# EAGLE board Atemfrequenzmesser_Board_V1 (EAGLE 9.6.2)
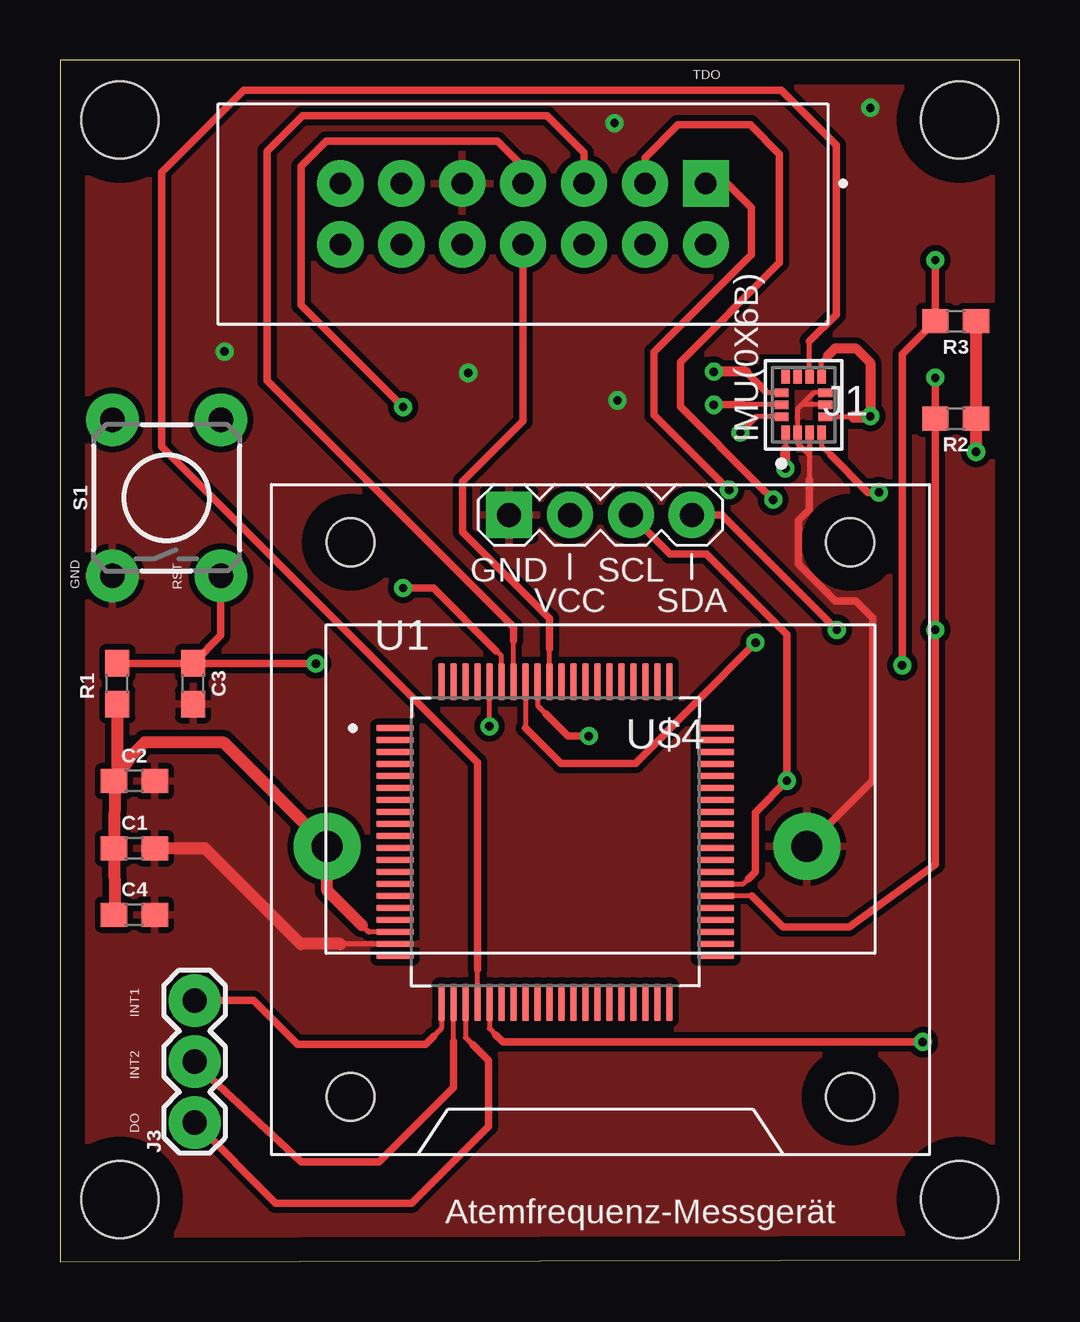
[diagram p0: board, top side]
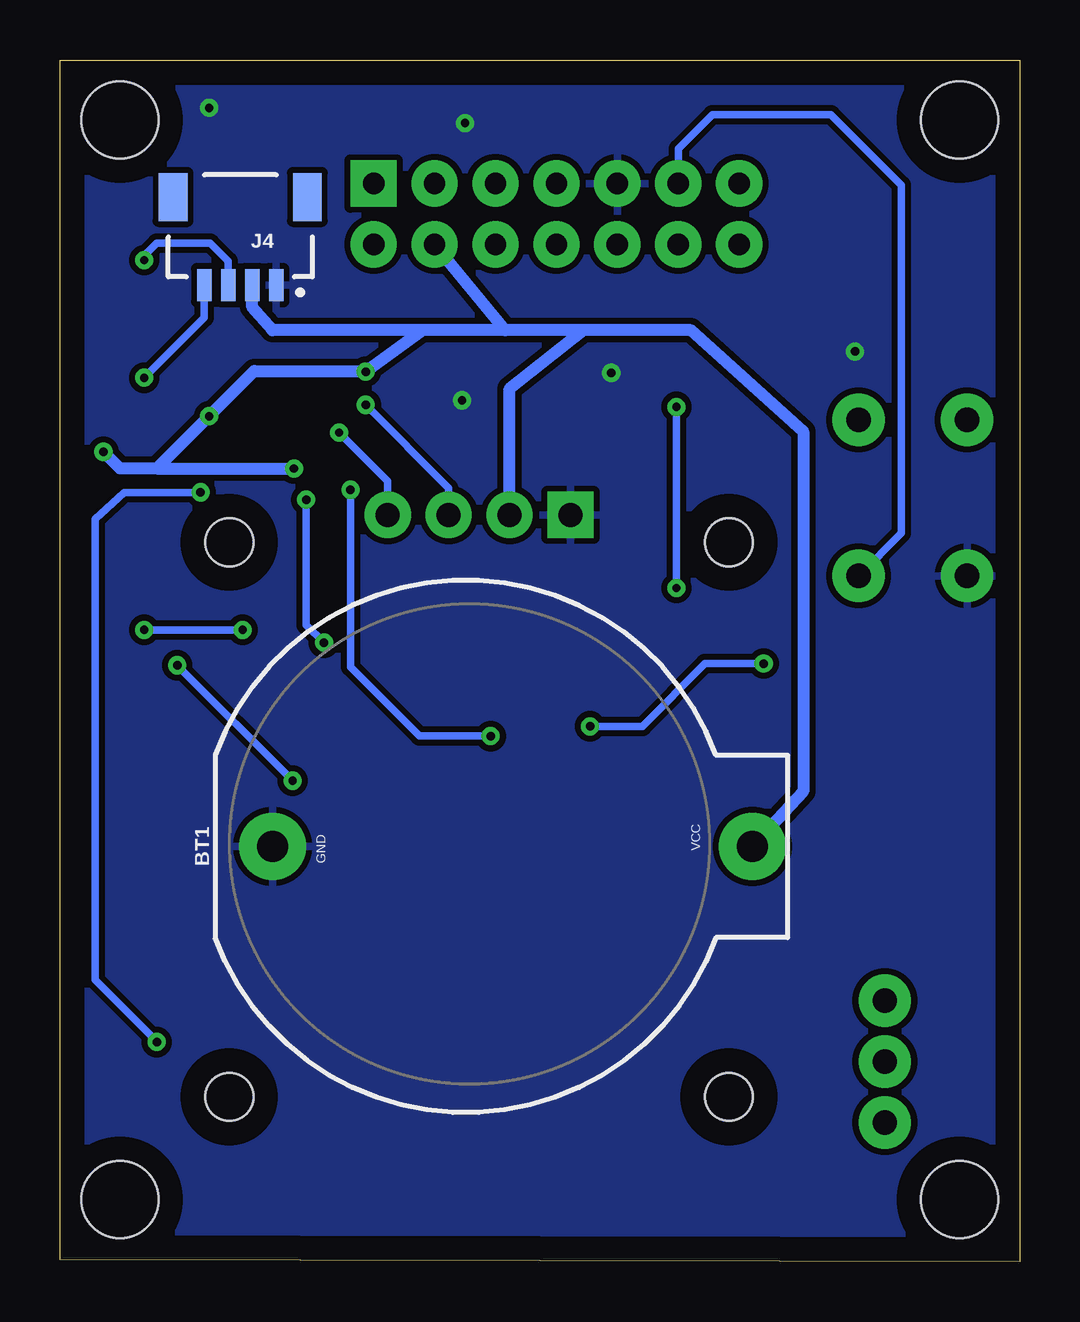
[diagram p1: board, bottom side, seen from below]

Size 40 x 50.1 mm. Coordinates in mm from the lower left corner, seen from the top.
Outline: 0,0 40,0.1 40,50.1 0,50.1 0,0
Copper layers (1*16): Top 0.035mm / dielectric 1.5mm / Bottom 0.035mm
Design rules "default *": minimum track width 6mil, minimum drill 0.35mm, track to track 10mil, track to pad 10mil, pad to pad 5mil, via to via 10mil, smd to smd 6mil, copper to edge 40mil, drill to drill 6mil, minimum pad ring 10mil, minimum via ring 8mil, stop-mask expansion 4mil, vias tented up to drill 0mil, thermal gap 10mil
Net classes: 0 default: width 0 mm, drill 0 mm
Holes 3.2 mm at 2.5,2.6 2.5,47.6 37.5,47.6 37.5,2.6

## Footprints (pad centres in the part's own frame; a part is rotated, then mirrored left to right if it is on the bottom)
BATTCOM_20MM_PTH = drill 1.3 pad 2.794: 1 11.85,0; 2 -8.15,0
0603 = smd 1.1 x 1: 1 -0.85,0; 2 0.85,0
STMICROELECTRONICS_LSM6DSO32TR_0 = smd 0.575 x 0.35: 1 -1.162,0.75; 2 -1.162,0.25; 3 -1.162,-0.25; 4 -1.162,-0.75; 8 1.162,-0.75; 9 1.162,-0.25; 10 1.162,0.25; 11 1.162,0.75 | smd 0.35 x 0.575: 5 -0.5,-0.912; 6 0,-0.912; 7 0.5,-0.912; 12 0.5,0.912; 13 0,0.912; 14 -0.5,0.912 | smd 0.529 x 0.304: SMD_15 -1.162,0.75; SMD_16 -1.162,0.25; SMD_17 -1.162,-0.25; SMD_18 -1.162,-0.75; SMD_19 1.162,-0.75; SMD_20 1.162,-0.25; SMD_21 1.162,0.25; SMD_22 1.162,0.75 | smd 0.304 x 0.529: SMD_23 -0.5,-0.912; SMD_24 0,-0.912; SMD_25 0.5,-0.912; SMD_26 0.5,0.912; SMD_27 0,0.912; SMD_28 -0.5,0.912
TE_1761606-5 = drill 0.89 pad 1.93 square: 1 0,0 | drill 0.89 pad 1.93: 2 0,2.54; 3 2.54,0; 4 2.54,2.54; 5 5.08,0; 6 5.08,2.54; 7 7.62,0; 8 7.62,2.54; 9 10.16,0; 10 10.16,2.54; 11 12.7,0; 12 12.7,2.54; 13 15.24,0; 14 15.24,2.54
1X03 = drill 1.016 pad 2.184: 1 0,0; 2 2.54,0; 3 5.08,0
JST04_1MM_RA = smd 0.6 x 1.35: 1 -1.5,0; 2 -0.5,0; 3 0.5,0; 4 1.5,0 | smd 1.2 x 2: NC1 2.8,-3.675; NC2 -2.8,-3.675
TACTILE_SWITCH_PTH_6.0MM = drill 1.016 pad 2.184: 1 -3.251,2.261; 2 3.251,2.261; 3 -3.251,-2.261; 4 3.251,-2.261
QFP50P1400X1400X160-80N = smd 1.56 x 0.28: 1 -6.68,4.75; 2 -6.68,4.25; 3 -6.68,3.75; 4 -6.68,3.25; 5 -6.68,2.75; 6 -6.68,2.25; 7 -6.68,1.75; 8 -6.68,1.25; 9 -6.68,0.75; 10 -6.68,0.25; 11 -6.68,-0.25; 12 -6.68,-0.75; 13 -6.68,-1.25; 14 -6.68,-1.75; 15 -6.68,-2.25; 16 -6.68,-2.75; 17 -6.68,-3.25; 18 -6.68,-3.75; 19 -6.68,-4.25; 20 -6.68,-4.75; 41 6.68,-4.75; 42 6.68,-4.25; 43 6.68,-3.75; 44 6.68,-3.25; 45 6.68,-2.75; 46 6.68,-2.25; 47 6.68,-1.75; 48 6.68,-1.25; 49 6.68,-0.75; 50 6.68,-0.25; 51 6.68,0.25; 52 6.68,0.75; 53 6.68,1.25; 54 6.68,1.75; 55 6.68,2.25; 56 6.68,2.75; 57 6.68,3.25; 58 6.68,3.75; 59 6.68,4.25; 60 6.68,4.75 | smd 0.28 x 1.56: 21 -4.75,-6.68; 22 -4.25,-6.68; 23 -3.75,-6.68; 24 -3.25,-6.68; 25 -2.75,-6.68; 26 -2.25,-6.68; 27 -1.75,-6.68; 28 -1.25,-6.68; 29 -0.75,-6.68; 30 -0.25,-6.68; 31 0.25,-6.68; 32 0.75,-6.68; 33 1.25,-6.68; 34 1.75,-6.68; 35 2.25,-6.68; 36 2.75,-6.68; 37 3.25,-6.68; 38 3.75,-6.68; 39 4.25,-6.68; 40 4.75,-6.68; 61 4.75,6.68; 62 4.25,6.68; 63 3.75,6.68; 64 3.25,6.68; 65 2.75,6.68; 66 2.25,6.68; 67 1.75,6.68; 68 1.25,6.68; 69 0.75,6.68; 70 0.25,6.68; 71 -0.25,6.68; 72 -0.75,6.68; 73 -1.25,6.68; 74 -1.75,6.68; 75 -2.25,6.68; 76 -2.75,6.68; 77 -3.25,6.68; 78 -3.75,6.68; 79 -4.25,6.68; 80 -4.75,6.68
DISPLAY-OLED-128X64-I2C = drill 1 pad 1.93 square: 1 -3.81,12.7 | drill 1 pad 1.93: 2 -1.27,12.7; 3 1.27,12.7; 4 3.81,12.7 | hole 2: -10.414,11.557; 10.414,11.557; 10.414,-11.557; -10.414,-11.557

## Placement (x,y rotation side)
BT1  3.3V  [BATTCOM_20MM_PTH]  22.99,17.32 0 bottom
C1  10uF  [0603]  3.1,17.25 0 top
C2  100nF  [0603]  3.1,20.05 0 top
C3  2.2nF  [0603]  5.54,24.1 270 top
C4  100nF  [0603]  3.1,14.47 0 top
IMU(0X6B)  STMICROELECTRONICS_LSM6DSO32TRSTMICROELECTRONICS_LSM6DSO32TR_0_0  [STMICROELECTRONICS_LSM6DSO32TR_0]  31,35.73 90 top
J1  1761606-5  [TE_1761606-5]  26.92,44.95 180 top
J3  [1X03]  5.61,5.81 90 top
J4  IMU(0X6A)  [JST04_1MM_RA]  32.49,40.71 180 bottom
R1  47k  [0603]  2.39,24.1 90 top
R2  10k  [0603]  37.34,35.15 180 top
R3  10k  [0603]  37.34,39.22 180 top
S1  [TACTILE_SWITCH_PTH_6.0MM]  4.45,31.85 90 top
U1  MSP430F5519IPNR  [QFP50P1400X1400X160-80N]  20.65,17.5 0 top
U$4  DISPLAY-OLED-128X64-I2C  [DISPLAY-OLED-128X64-I2C]  22.53,18.44 0 top

## Library data of the parts
BT1 = SparkFun-Batteries1; PROD_ID: BATT-09031; SF_SKU: PRT-00783
C1-C4 = SparkFun-Capacitors; PROD_ID: CAP-07879
IMU(0X6B) = STMicroelectronics - LSM6DSO32TR; ACCEL_RANGE: 4/8/16/32g; AUTOMOTIVE: No; CENTROID_NOT_SPECIFIED: No; DATASHEET: https://eu.mouser.com/datasheet/2/389/dm00603953-1862087.pdf; DEVICE_CLASS_L1: Sensors; DEVICE_CLASS_L2: Motion Sensors; DEVICE_CLASS_L3: Inertial Measurement Units (IMUs); DIGIKEY_DESCRIPTION: INEMO INERTIAL MODULE: 3D ACCELE; DIGIKEY_PART_NUMBER: 497-LSM6DSO32CT-ND; FOOTPRINT_VARIANT_NAME_0: Recommended_Land_Pattern; HEIGHT: 0.86mm; LEAD_FREE: Yes; MAX_SUPPLY_VOLTAGE: 3.6V; MF: STMicroelectronics; MFG_PACKAGE_IDENT: LGA-14L-DM00249496; MFG_PACKAGE_IDENT_COMPONENT_ID: 648051b55531c14c; MFG_PACKAGE_IDENT_DATE: 0; MFG_PACKAGE_IDENT_REV: 1; MIN_SUPPLY_VOLTAGE: 1.62V; MOUSER_DESCRIPTION: Accelerometer and 3D Gyroscope 3D Always-On 1.71V to 3.6V 0.55mA 14-Pin LGA T/R; MOUSER_PART_NUMBER: 511-LSM6DSO32TR; MPN: LSM6DSO32TR; OPERATING_SUPPLY_CURRENT: 0.55mA; PACKAGE: LGA14; PREFIX: U; RESOLUTION: 16bits; ROHS: Yes; SENSOR_OUTPUT: I2C,SPI; SENSOR_TYPE: Temperature,Accelerometer,Gyroscope; TEMPERATURE_RANGE_HIGH: +85°C; TEMPERATURE_RANGE_LOW: -40°C; VERIFICATION_VERSION: 0.0.0.3
J1 = 1761606-5; AVAILABILITY: In Stock; COMMENT: 1761606-5; DESCRIPTION: Header, Pin, Idc, Amp-Latch, 14 Pos, Low Profile, Pcb, Vertical, Black; MF: TE Connectivity; MP: 1761606-5; PACKAGE: None; PRICE: None; PURCHASE-URL: https://pricing.snapeda.com/search/part/1761606-5/?ref=eda
J3 = SparkFun-Connectors1
J4 = SparkFun-Connectors; PROD_ID: CONN-13694
R1-R3 = SparkFun-Resistors; PROD_ID: RES-07856
S1 = SparkFun-Switches1; PROD_ID: SWCH-08441; SF_SKU: COM-00097
U1 = MSP430F5519IPNR; AVAILABILITY: In Stock; DESCRIPTION: 25 MHz MCU with 128KB Flash, 8KB SRAM, Comparator, DMA, UART/SPI/I2C, USB, Timer, HW Multiplier 80-LQFP -40 to 85; MF: Texas Instruments; MP: MSP430F5519IPNR; PACKAGE: LQFP-80 Texas Instruments; PRICE: None; PURCHASE-URL: https://pricing.snapeda.com/search/part/MSP430F5519IPNR/?ref=eda
U$4 = ahmet

## Nets
AVCC1: U1.11
AVSS1: U1.14
AVSS2: U1.68
DO(IMU2): J3.1 U1.23
DVCC2: U1.50
DVSS2: U1.49
GND: BT1.2 C1.2 C2.2 C3.2 C4.2 IMU(0X6B).2 IMU(0X6B).3 IMU(0X6B).6 IMU(0X6B).7 J1.9 J4.1 S1.1 U1.19 U$4.1
INT1@1: IMU(0X6B).4 U1.25
INT1@2: J3.3 U1.21
INT2@1: IMU(0X6B).9 U1.24
INT2@2: J3.2 U1.22
RST: C3.1 J1.11 R1.2 S1.3 U1.76
SCL: IMU(0X6B).13 J4.3 R3.2 U1.47 U$4.3
SDA: IMU(0X6B).14 J4.4 R2.2 U1.46 U$4.4
TCK: J1.7 U1.75
TDI: J1.3 U1.73
TDO: J1.1 U1.72
TEST: J1.8 U1.71
TMS: J1.5 U1.74
V18: U1.67
VCC: BT1.1 C1.1 C2.1 C4.1 IMU(0X6B).1 IMU(0X6B).5 IMU(0X6B).8 IMU(0X6B).12 J1.4 J4.2 R1.1 R2.1 R3.1 U1.18 U$4.2
VCORE: U1.20
VSSU: U1.61

## Tracks (layer width: path | path; a pad name or v marks a point on that pad's centre or on a via)
DO(IMU2)
  Top 0.203: U1.23 16.9,9.36 17.22,9.04
  Top 0.305: J3.1 5.61,5.83 8.99,2.45 14.66,2.45 17.86,5.65 17.86,8.41 17.22,9.04
GND  (via drill 0.35)
  Top 0.203: 30.93,35.73 31.43,36.23 IMU(0X6B).7 | 30.93,35.73 30.75,35.55 IMU(0X6B).2 30.75,34.13 31.25,33.63 | IMU(0X6B).6 30.93,35.73 | U1.19 11.69,13.25 | IMU(0X6B).3 31.25,33.63 | 31.25,33.63 31.25,32.62
  Top 0.305: BT1.2 33.88,20.07 33.88,26.85 33.17,27.56 32.32,27.56 30.77,29.1 30.77,30.89 31.25,31.37 31.25,32.62
  Top 0.508: C1.2 6.04,17.25 10.04,13.25 11.69,13.25
  other vias: 23.24,35.91 23.11,47.47 33.78,48.11 17.02,37.06 6.86,37.95
  pour Top: -4.06,51.31 -4.06,-3.96 -3.25,-4.78 43.08,-4.78 44.7,-3.15 44.7,52.12 43.08,53.74 -1.63,53.74 -3.25,52.12
  pour Bottom: -3.25,56.18 -6.63,52.8 -6.63,-5.46 -4.98,-7.11 43.28,-7.11 46.96,-3.43 46.96,53.24 44.02,56.18
INT1@1  (via drill 0.35)
  Top 0.203: 18.16,9.47 17.9,9.73 U1.25 | IMU(0X6B).4 31.75,34.01 32.13,33.63
  Top 0.305: v35.97,9.17 18.46,9.17 18.16,9.47 | v34.14,32.08 33.68,32.08 32.13,33.63
  Bottom 0.305: v34.14,32.08 37.31,32.08 38.53,30.96 38.53,11.76 35.97,9.19 v35.97,9.17
INT1@2
  Top 0.203: 15.57,9.4 15.9,9.73 U1.21
  Top 0.305: J3.3 8.08,10.89 9.91,9.07 15.24,9.07 15.57,9.4
INT2@1
  Top 0.203: IMU(0X6B).9 31.25,38.37 | U1.24 17.4,12.19
  Top 0.254: 17.4,12.19
  Top 0.305: 31.25,38.37 32.36,39.49 32.36,46.55 30.07,48.84 7.66,48.84 4.24,45.43 4.24,33.98 16.57,21.65 | 17.4,12.19 17.4,20.82 16.57,21.65 | 16.57,21.65
INT2@2
  Top 0.203: 16.4,9.2 U1.22
  Top 0.305: J3.2 6.31,7.66 10.06,4.17 13.3,4.17 16.4,7.27 16.4,9.2
RST  (via drill 0.35)
  Top 0.203: 17.9,22.4 U1.76
  Top 0.305: R1.2 C3.1 | C3.1 6.71,26.12 S1.3 | C3.1 10.22,24.95 v10.67,24.94 | v17.9,22.33 17.9,22.4
  Bottom 0.305: J1.11 14.22,46.4 12.79,47.83 7.87,47.83 4.93,44.88 4.93,30.38 S1.3 | v10.67,24.94 13.11,24.94 15.72,22.33 v17.9,22.33
SCL  (via drill 0.35)
  Top 0.203: IMU(0X6B).13 28.46,35.73 | U1.47 28.47,15.75 28.69,15.97
  Top 0.305: U$4.3 25.43,29.51 26.94,29.51 30.3,26.15 v30.3,20.06 28.98,18.74 28.98,16.26 28.69,15.97 | v35.11,24.87 35.11,37.85 R3.2 v36.49,41.76 | 28.46,35.73 v27.25,35.73
  Bottom 0.305: v27.25,35.73 23.8,32.26 U$4.3 | v35.11,24.87 v30.3,20.06 | v36.49,41.76 36.49,41.95 35.97,42.47 33.73,42.47 32.99,41.72 J4.3
SDA  (via drill 0.35)
  Top 0.203: 28.84,15.25 U1.46 | IMU(0X6B).14 29.02,35.23
  Top 0.254: 29.02,35.23 v28.37,34.57
  Top 0.305: 28.84,15.25 30.14,13.96 32.91,13.96 36.49,16.56 v36.49,26.35 R2.2 v36.49,36.85 | U$4.4 27.59,31.14 v32.38,26.35
  Bottom 0.305: v28.37,34.57 26.34,32.54 U$4.4 | v36.49,26.35 v32.38,26.35 | J4.4 33.99,39.36 v36.49,36.85
TCK  (via drill 0.35)
  Top 0.203: U1.75 18.4,25.26 18.19,25.48
  Top 0.305: J1.7 19.3,45.64 18.24,46.71 11.1,46.71 10.06,45.67 10.06,39.88 v14.3,35.63 | 18.19,25.48 15.57,28.09 v14.3,28.09
  Bottom 0.305: v14.3,35.63 v14.3,28.09
TDI  (via drill 0.35)
  Top 0.203: U1.73 19.4,22.25
  Top 0.305: J1.3 24.38,46.02 25.76,47.4 28.78,47.4 30,46.18 30,41.65 25.86,37.51 25.86,35.65 29.12,32.38 v29.73,31.77 | v29,25.81 23.99,20.78 20.88,20.78 19.4,22.25
  Bottom 0.305: v29,25.81 29.73,26.55 v29.73,31.77
TDO  (via drill 0.35)
  Top 0.203: 20.27,22.83 19.91,23.19 U1.72
  Top 0.305: J1.1 27.83,44.95 28.83,43.95 28.83,41.98 24.77,37.92 24.77,35.3 v27.89,32.18 | v22.05,21.92 21.18,21.92 20.27,22.83
  Bottom 0.305: v27.89,32.18 27.89,24.79 25.02,21.92 v22.05,21.92
TEST
  Top 0.203: U1.71 20.4,25.57
  Top 0.305: J1.8 19.3,35.05 16.79,32.54 16.79,30.43 20.4,26.81 20.4,25.57
TMS
  Top 0.203: U1.74 18.9,25.9
  Top 0.254: 18.9,25.9 18.9,25.91
  Top 0.305: J1.5 21.84,46.23 20.3,47.78 10.11,47.78 8.64,46.3 8.64,36.74 18.9,26.47 18.9,25.91
VCC  (via drill 0.35)
  Top 0.203: IMU(0X6B).12 29.48,36.23 29.37,36.34 | IMU(0X6B).1 30.25,33.88 | 32.03,37.79 31.75,37.51 IMU(0X6B).8 | IMU(0X6B).5 33.1,35.23 | 12.57,14.04 12.87,13.75 U1.18
  Top 0.305: 29.37,36.34 28.6,37.11
  Top 0.406: v30.25,33.07 30.25,33.88 | 28.6,37.11 v27.25,37.11 | v33.78,35.25 33.78,37.48 33.18,38.08 32.32,38.08 32.03,37.79
  Top 0.508: C2.1 2.27,20.28 C1.1 2.27,14.72 C4.1 | R1.1 2.39,20.44 C2.1 | 12.57,14.04 11.14,15.48 BT1.1 6.79,21.67 3.55,21.67 2.89,21.01 2.89,20.94 C2.1 | v33.78,35.25 33.75,35.23 33.1,35.23 | v38.19,33.77 R2.1 R3.1
  Bottom 0.508: BT1.1 9.02,19.62 9.02,34.62 13.69,38.84 18.19,38.84 | 35.97,33.07 v30.25,33.07 | 35.97,33.07 v33.78,35.25 31.9,37.13 27.28,37.13 v27.25,37.11 24.89,38.84 | v38.19,33.77 37.49,33.07 35.97,33.07 | 18.19,38.84 21.45,38.84 | 21.45,38.84 24.89,38.84 | U$4.2 21.26,36.4 18.19,38.84 | J1.4 21.45,38.84 | J4.2 31.99,39.81 31.14,38.84 24.89,38.84

## Text on the board
tNames: TDO | GND | RST | INT1 | INT2 | DO | Atemfrequenz-Messgerät
bNames: GND | VCC